# Altium PCB Copy of Irrigation_System.PcbDoc
Units mm, origin at the board's own origin, x right, y up, seen from the top; angles counter-clockwise.
Board outline 159.5 x 91.22 mm, 2 copper layers (Top Layer, Bottom Layer); 27 components, 26 nets, 100 pads, 0 vias.
Unrouted connection lines stored in the file: 1.
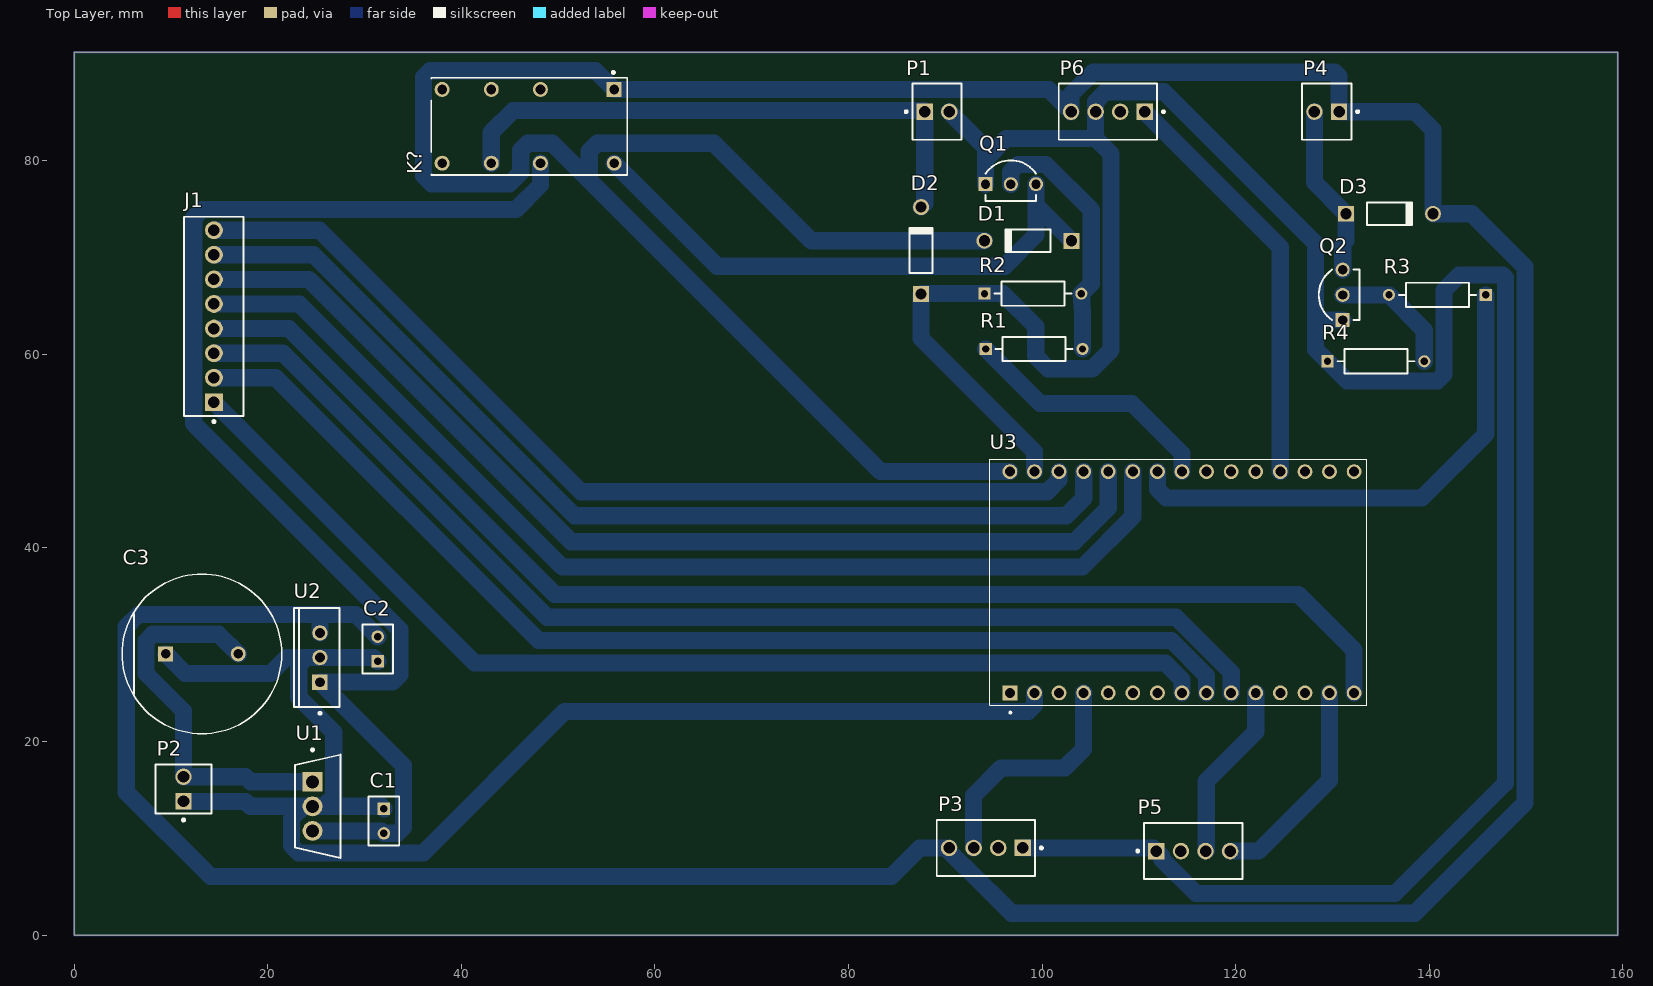
[diagram p0: Top Layer view]
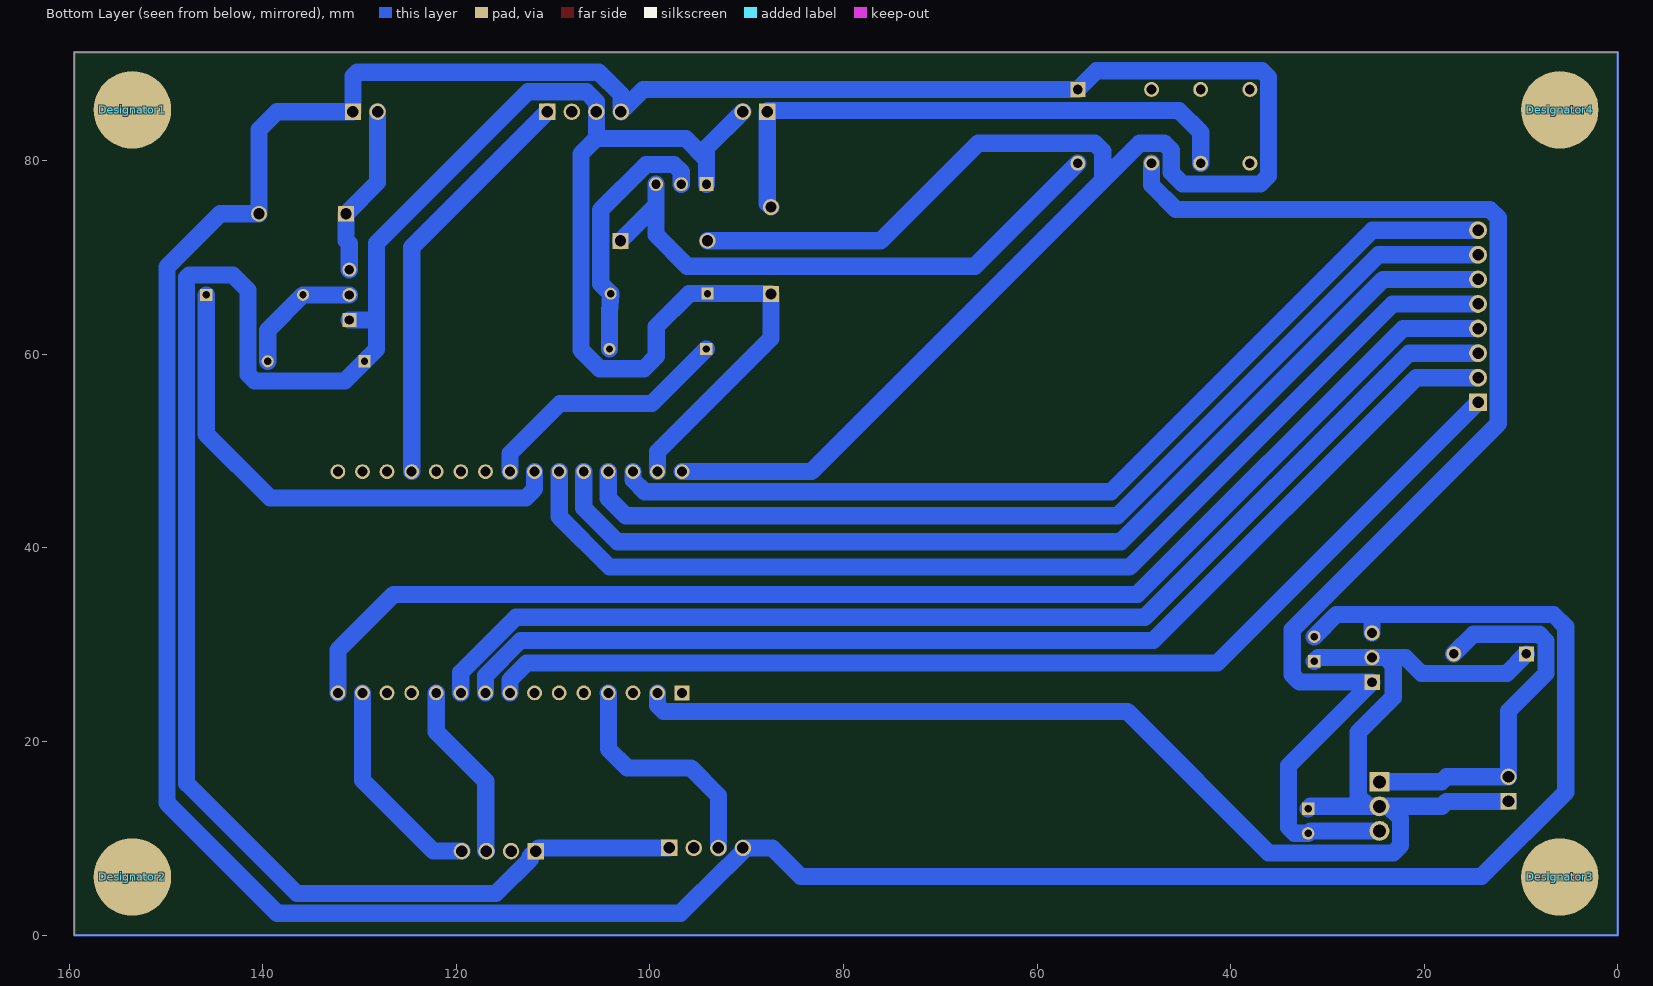
[diagram p1: Bottom Layer view, seen from below]

## Layer stack, top to bottom
Top Solder: solder mask 0.0102, Solder Resist, Dk 3.5
Top Layer: signal copper 0.0356
Dielectric 1: dielectric 0.32, FR-4, Dk 4.8
Bottom Layer: signal copper 0.0356
Bottom Solder: solder mask 0.0102, Solder Resist, Dk 3.5

## Board outline
0,0.325 0,0.475 0,91.225 159.15,91.225 159.325,91.225 159.5,91.225 159.5,0 0.2,0 0,0

## Design rules (kind name [scope] priority, off if disabled: settings)
Clearance [All] p1: gap=0.254 ignorepadtopadclearanceinfootprint=FALSE
PolygonConnect [All] p1: connectstyle=Relief reliefconductorwidth=0.254 reliefentries=4 polygonreliefangle="90 Angle" airgapwidth=0.254
RoutingLayers [All] p1: top layer_v5=FALSE bottom layer_v5=TRUE
RoutingVias [All] p1: holewidth=0.711 width=1.27 viastyle="Through Hole" minholewidth=0.711 minwidth=1.27 maxholewidth=0.711 maxwidth=1.27
SolderMaskExpansion [All] p1: expansion=0.102 istentingtop=FALSE
SupplyNets "Schematic Supply Nets_3" [InNet('+12V')] p1: voltage=0.000
SupplyNets "Schematic Supply Nets_2" [InNet('GND')] p2: voltage=0.000
SupplyNets "Schematic Supply Nets_1" [InNet('+5V')] p3: voltage=0.000
SupplyNets "Schematic Supply Nets" [InNet('+24V')] p4: voltage=0.000
Width [All] p1: maxlimit=1.778 minlimit=1.778 preferedwidth=1.778 minimp=50.000000 maximp=50.000000 favimp=50.000000
29 further rules are at their usual default settings.

## Components (designator, comment, footprint, x,y, rotation, side; value= is the part's Value field where it differs from the comment)
C1 "100nf" CAPR51-254-508X318X736 32.006,11.78 r270 top
C2 "100nf" CAPR51-254-508X318X736 31.371,29.56 r90 top
C3 "1000uf" FP-RAD-TH-D_16_0_5-L_25_2-MFG 13.21,29.052 r0 top
D1 "1N4001-T" DIOD-DO-41-P-2_V 98.554,71.729 r180 top
D2 "1N4001-T" DIOD-DO-41-P-2_V 87.505,70.713 r90 top
D3 "1N4001-T" DIOD-DO-41-P-2_V 135.892,74.523 r0 top
Designator1 "Comment" 7466214 153.475,85.25 r180 bottom
Designator2 "Comment" 7466214 153.475,6 r180 bottom
Designator3 "Comment" 7466214 6,6 r180 bottom
Designator4 "Comment" 7466214 6,85.25 r180 bottom
J1 "Keypad (4x4)" FP-22-29-2081-MFG 14.43,63.93 r270 top
K? "V23105A5305A201" FP-V23105A5305A201-MFG 47.025,83.55 r180 top
P1 "FAN (Connect)" MOLX-22-27-2021_V 89.156,85.064 r0 top
P2 "+24V IN" MOLX-22-27-2021_V 11.305,15.082 r90 top
P3 "22-27-2041" MOLX-22-27-2041_V 94.205,9 r0 top
P4 "Water Pump (Connect)" MOLX-22-27-2021_V 129.415,85.064 r180 top
P5 "LCD 16x2( I2C)" MOLX-22-27-2041_V 115.625,8.675 r180 top
P6 "Hygrometer Humidity" MOLX-22-27-2041_V 106.809,85.064 r0 top
Q1 "2N7000-D74Z" FP-135AR-MFG 96.776,77.952 r90 top
Q2 "2N7000-D74Z" FP-135AR-MFG 130.685,66.141 r180 top
R1 "220 ohms" FP-MRS25-MFG 99.189,60.553 r0 top
R2 "100.0k ohms" FP-MRS25-MFG 99.062,66.268 r0 top
R3 "220 ohms" FP-MRS25-MFG 140.845,66.141 r180 top
R4 "100.0 ohm" FP-MRS25-MFG 134.495,59.283 r0 top
U1 "LM7812CT" FP-TO220B03-MFG 25.18,13.299 r0 top
U2 "LM7805CT" FAIR-TO-220-3 25.402,28.671 r180 top
U3 "ESP32" XCVR_ESP32-C3-DEVKITC-02 114.075,36.45 r90 top

## Footprints (in the part's own frame and the unit in brackets; to place one, negate y for a bottom-side part, rotate by r counter-clockwise, add the part's x,y. Pads: shape width x height; smd on the part's side, far side on the other; paste and mask are expansions set on the pad)
7466214 [mm] "SMD with external thread with Pin, M4-5mm"
  round 8 smd paste-403.566: 1(0,0)
  body extent -3.49,-3.5 3.49,3.5, height 8
CAPR51-254-508X318X736 [mm] "THD, 2-Leads, Body 5.08x3.18mm"
  rect 1.3x1.3 hole 0.8: 1(-1.27,0)
  round 1.3 hole 0.8: 2(1.27,0)
  silkscreen extent -2.54,-1.59 2.54,1.59, body extent -2.54,-1.59 2.54,1.59, height 7.36
DIOD-DO-41-P-2_V [mm] "2-Leads, Axial Lead, Body 4.635x2.36mm, Pin Spacing 9mm"
  rect 1.65x1.65 hole 1.15: 1(-4.5,0)
  round 1.65 hole 1.15: 2(4.5,0)
  silkscreen extent -2.32,-1.18 2.32,1.18, body extent -4.93,-1.18 4.93,1.18, height 2.35
FAIR-TO-220-3 [mm] "FM, 3-Leads, Body 10.2x4.7mm, Pitch 2.54mm"
  rect 1.6x1.6 hole 1: 1(0,2.54)
  round 1.6 hole 1: 2(0,0) 3(0,-2.54)
  silkscreen extent -2.04,-5.1 2.66,5.87, body extent -2.04,-5.1 2.66,5.1, height 18.95
FP-22-29-2081-MFG [mm]
  rect 1.84x1.84 hole 1.19 paste-2539.97 mask+0: 1(8.89,0.02)
  round 1.84 hole 1.19 paste-2539.97 mask+0: 2(6.35,0.02) 3(3.81,0.02) 4(1.27,0.02) 5(-1.27,0.02) 6(-3.81,0.02) 7(-6.35,0.02) 8(-8.89,0.02)
  silkscreen extent -10.29,-3.08 11.01,3.07, body extent -10.39,-3.18 10.39,3.17, height 0.25
FP-135AR-MFG [mm]
  rect 1.45x1.45 hole 0.95 paste-2539.97 mask+0: 1(-0.38,2.6)
  round 1.45 hole 0.95 paste-2539.97 mask+0: 2(-0.38,0) 3(-0.38,-2.6)
  silkscreen extent -2.1,-2.6 2.09,2.6, body extent -2.19,-3.42 2.19,3.42, height 0.25
FP-MRS25-MFG [mm]
  rect 1.25x1.25 hole 0.75 paste-2539.97 mask+0: 1(-5,0)
  round 1.25 hole 0.75 paste-2539.97 mask+0: 2(5,0)
  silkscreen extent -3.97,-1.25 3.97,1.25, body extent -5.72,-1.35 5.72,1.35, height 0.25
FP-RAD-TH-D_16_0_5-L_25_2-MFG [mm]
  rect 1.55x1.55 hole 1 paste-2539.97 mask+0: 1(-3.75,0)
  round 1.55 hole 1 paste-2539.97 mask+0: 2(3.75,0)
  silkscreen extent -8.25,-8.25 8.25,8.25, body extent -8.35,-8.35 8.35,8.35, height 0.25
FP-TO220B03-MFG [mm]
  rect 2.05x2.05 hole 1.35 paste-2539.97 mask+0: 1(-0.54,2.535)
  round 2.05 hole 1.35 paste-2539.97 mask+0: 2(-0.54,0) 3(-0.54,-2.535)
  silkscreen extent -2.35,-5.33 2.35,5.96, body extent -2.45,-5.44 2.45,5.44, height 0.25
FP-V23105A5305A201-MFG [mm]
  rect 1.55x1.55 hole 1 paste-2539.97 mask+0: 1(-8.78,-3.81)
  round 1.55 hole 1 paste-2539.97 mask+0: 4(-1.16,-3.81) 6(3.92,-3.81) 8(9,-3.81) 9(9,3.81) 11(3.92,3.81) 13(-1.16,3.81) 16(-8.78,3.81)
  silkscreen extent -10.12,-5.7 10.13,5.02, body extent -10.23,-5.13 10.23,5.13, height 0.25
MOLX-22-27-2021_V [mm] "Header, 2-Leads, Body 5.8x5.08mm"
  rect 1.7x1.7 hole 1.19: 1(-1.27,0)
  round 1.7 hole 1.19: 2(1.27,0)
  silkscreen extent -3.31,-2.9 2.54,2.9, body extent -2.54,-2.9 2.54,2.9, height 11.72
MOLX-22-27-2041_V [mm] "CONN, 4-Leads, Body 10.16x5.8mm, Pitch 2.54mm"
  rect 1.7x1.7 hole 1.19: 1(3.81,0)
  round 1.7 hole 1.19: 2(1.27,0) 3(-1.27,0) 4(-3.81,0)
  silkscreen extent -5.08,-2.9 5.86,2.9, body extent -5.08,-2.9 5.08,2.9, height 11.7
XCVR_ESP32-C3-DEVKITC-02 [mm]
  rect 1.53x1.53 hole 1.02: 1(-11.43,17.392)
  round 1.53 hole 1.02: 2(-11.43,14.852) 3(-11.43,12.312) 4(-11.43,9.772) 5(-11.43,7.232) 6(-11.43,4.692) 7(-11.43,2.152) 8(-11.43,-0.388) 9(-11.43,-2.928) 10(-11.43,-5.468) 11(-11.43,-8.008) 12(-11.43,-10.548) 13(-11.43,-13.088) 14(-11.43,-15.628) 15(-11.43,-18.168) 16(11.43,-18.168) 17(11.43,-15.628) 18(11.43,-13.088) 19(11.43,-10.548) 20(11.43,-8.008) 21(11.43,-5.468) 22(11.43,-2.928) 23(11.43,-0.388) 24(11.43,2.152) 25(11.43,4.692) 26(11.43,7.232) 27(11.43,9.772) 28(11.43,12.312) 29(11.43,14.852) 30(11.43,17.392)
  silkscreen extent -13.56,-19.46 12.7,19.45

## Part data
C1 C2: library part CMP-1664-00004-1, "Radial Leaded Multilayer Ceramic Capacitor, 0.1 uF, +/- 10%, 50 V, -55 to 125 degC, 2-Pin THD, RoHS, Tape and Reel", Case\Package=SOT-23-5, Dropout Voltage="260 mV", Max Input Voltage="8 V", Max Operating Temperature="85 degC", Max Power Dissipation="250 mW", Min Operating Temperature="-40 degC", Output Current="150 mA", Output Voltage="5 V", Package Quantity=3000, ComponentLink1Description="Manufacturer URL", ComponentLink1URL=http://www.kemet.com/, ComponentLink2Description=Datasheet, ComponentLink2URL=http://www.kemet.com/docfinder?Partnumber=C320C104K5R5TA, DatasheetVersion=Dec-15, Height="1.3 mm", Length="3 mm", Mount="Surface Mount", Outputs=1, PackageDescription="2-Pin Through Hole Device, Body 5.08 x 3.18 mm, Pitch 2.54 mm", PackageReference=CAPR51-254-508X318X736, Packaging="Tape and Reel", Pins=5, Radiation Hardening=No, RoHSCompliant=true, Width="1.8 mm"
C3: library part CMP-05427-000487-1, "Aluminum Electrolytic Capacitors (Radial Lead Type) 1000uF ±20% 50V", Capacitance=1mF, Case/Package=Radial, ESR (Equivalent Series Resistance)=16mR, Max Operating Temperature=105°C, Min Operating Temperature=-40°C, Package Quantity=250, Ripple Current=3.32A, Tolerance=20%, Voltage Rating=50V, Contact Plating=Tin, Diameter=16mm, Features="General Purpose", Height=25mm, Height - Seated (Max)=0.984inch, Impedance=16mR, Lead Diameter=0.8mm, Lead Free="Lead Free", Lead Pitch=7.5mm, Length=25mm, Life (Hours)=10000Hour, Mount="Through Hole", Number of Pins=2, Packaging="Tape and Reel", Polarity=Polar, Radiation Hardening=No, REACH SVHC="No SVHC", RoHS Compliant=Yes, Series=FR, Termination="Through Hole", Voltage Rating (DC)=50V
D1 D2 D3: library part CMP-0639-00006-2, "1.0 A Rectifier, 15 pF, 50 V, -65 to 150 degC, 2-Pin DO-41 Plastic, RoHS, Tape and Reel", Manufacturer="Diodes Inc", Max. Average Rectified Current IO (A)=1, Operating Temperature Range (degC)="-65 to 150", ComponentLink1Description="Manufacturer URL", ComponentLink1URL=http://diodes.com/, ComponentLink2Description=Datasheet, ComponentLink2URL=http://diodes.com/datasheets/ds28002.pdf, CT (pF)=15, DatasheetVersion="Rev. 8-2", Max. IFSM (A)=30, Max. IR (uA)=5, Mounting Technology="Through Hole", PackageDescription="2-Pin Axial Lead, Body 4.635 x 2.36 mm, Lead Spread 25.4 mm", PackageReference=DO-41-P-2, Packing="Tape and Reel", PartNumber=1N4001-T, RoHS=TRUE, VF (V)=1, VRRM (V)=50
J1: library part CMP-00257-00277737-1, "22-29-2081 KK® 254 Wire-to-Board Header, Vertical, with Friction Lock, 8 Circuits, Gold (Au) Plating", Color=White, Contact Resistance=10mΩ, Current Rating=4A, Flammability Rating="UL94 V-0", Insulation Resistance=50GΩ, Max Operating Temperature=75°C, Min Operating Temperature=-40°C, Voltage Rating=250V, Contact Material=Brass, Contact Plating=Gold, Gender=Male, Glow Wire Compliant=Non-compliant, Halogen Free="Low Halogen", Height=11.42mm, Housing Material=Nylon, Lead Free="Lead Free", Lead Pitch=2.54mm, Mount="Through Hole", NexarPartId=277737, Number of Circuits=8, Number of Contacts=8, Number of Pins=8, Number of Positions=8, Number of Rows=1, Orientation=Vertical, Packaging=Bulk, Pitch=2.54mm, Radiation Hardening=No, REACH SVHC=Unknown, RoHS=Compliant, Schedule B=8536694040, Termination="Through Hole", Voltage Rating (DC)=250V
K?: library part CMP-03395-000159-1, "RELAY TELECOM DPDT 3A 24V", Ambient Temperature Range High=+85°C, Ambient Temperature Range Low=-40°C, Coil Power=200mW, Coil Resistance=2880Ω, Coil Voltage=24V, Current Rating=3A, Manufacturer="TE Connectivity", Temperature="-40°C to +85°C", Automotive=No, Category=Relay, Coil Type=Non-Latching, ComponentLink2Description=Datasheet, ComponentLink2URL=https://www.te.com/commerce/DocumentDelivery/DDEController?Action=showdoc&DocId=Specification+Or+Standard%7F108-98007%7F1017%7Fpdf%7FEnglish%7FENG_SS_108-98007_1017.pdf%7F9-1393792-9, Device Class L1=Electromechanical, Device Class L2=Relays, Device Class L3="Power Relays", Digikey Description="RELAY TELECOM DPDT 3A 24V", Height=10.9mm, Lead Free=Yes, Manufacturer Part Number=V23105A5305A201, Number of Contacts=2, Octopart=https://octopart.com/9-1393792-9-te+connectivity-41176539, Package=V23105A5305A201, RoHS=TRUE, Standoff Height=0.2mm, Switching Current=3A, Temperature Range High=+85°C, Temperature Range Low=-40°C, Throw Configuration=DPDT
P1 P2 P4: library part CMP-2000-05537-1, "Male Header, Pitch 2.54 mm, 1 x 2 Position, Height 11.7 mm, Tail Length 3.56 mm, 0 to 75 degC, RoHS, Bulk", Current - Max=4A, Manufacturer=Molex, Operating temperature=0°Cto+75°C, Package Description="2-Leads Header, Body 5.08 x 5.8 mm, Pitch 2.54 mm", Package Reference=22-27-2021, Package Version="Rev. BC, 02/2012", PartNumber=0022272021, Voltage - Max=250V, Contact Material=Tinplatedbrass, Current Rating=4A, Datasheet URL=http://www.molex.com/pdm_docs/sd/022272021_sd.pdf, Datasheet Version="Rev. F, 06/2009", Housing Material=Nylon(UL94V-0), Manufacturer URL=http://www.molex.com/, Mounting Technology=ThroughHole, No. of Positions=2, No. of Rows=1, Orientation=Vertical, Pitch=2.54mm, Voltage Rating=250V
P3 P5 P6: library part CMP-2000-05243-1, "Male Header, Pitch 2.54 mm, 1 x 4 Position, Height 11.7 mm, Tail Length 3.56 mm, RoHS, Bulk", Current Rating=4A, Manufacturer=Molex, Operating temperature=0degCto+75degC, Voltage Rating=250V, Contact Material=Tinplatedbrass, Datasheet URL=http://www.molex.com/pdm_docs/sd/022272041_sd.pdf, Datasheet Version="Rev. F, 06/2009", Housing Material=Nylon(UL94V-0), Manufacturer URL=http://www.molex.com/
Q1 Q2: library part CMP-00278-84793556-1, "2N7000-D74Z 2N7000 Series 60V 5 Ohms N-Ch Enhancement Mode Field Effect Transistor - TO-92", Continuous Drain Current (ID)=200mA, Drain to Source Breakdown Voltage=60V, Drain to Source Resistance=1.2Ω, Gate to Source Voltage (Vgs)=20V, Manufacturer Lifecycle Status=ACTIVE, Max Junction Temperature (Tj)=150°C, Min Operating Temperature=-55°C, Power Dissipation=400mW, Drain to Source Voltage (Vdss)=60V, Height=8.77mm, Lifecycle Status=Production, Max Operating Temperature=150°C, NexarPartId=84793556, Number of Channels=1, RoHS=Compliant, Schedule B=8541210080
R1 R2 R3 R4: library part CMP-00030-42632392-1, "MRS25000C1002FCT00 Resistor, 10 kOhm, ± 1%, 600 mW, Axial Leaded, Metal Film (Thin Film), Professional", Case/Package=Conformal, Max Operating Temperature=155°C, Max Power Dissipation=600mW, Min Operating Temperature=-55°C, Resistance=10kΩ, Temperature Coefficient=50ppm/°C, Tolerance=1%, Voltage Rating=350V, Composition="Metal Film, Thin Film", Contact Plating=Tin, Diameter=2.5mm, Lead Free="Lead Free", Lead Length=26mm, Length=6.5mm, Military Standard=Not, Mount="Through Hole", NexarPartId=42632392, Number of Pins=2, Number of Terminations=2, Power Rating=600mW, Radiation Hardening=No, REACH SVHC=Unknown, RoHS=Compliant, Schedule B="8533210090, 8533210090", Termination=Axial, Voltage Rating (DC)=350V, Width=2.5mm
U1: library part CMP-07128-000015-1, "IC REG LINEAR 12V 1A TO220-3", Dropout Voltage=2V, Manufacturer="ON Semiconductor", Max Supply Voltage=35V, Nominal Supply Current=5.1mA, Output Current=1A, Output Voltage=12V, Package=TO220B03, Temperature="-40°C to +125°C", Temperature Range High=+125°C, Temperature Range Low=-40°C, Accuracy Percentage=4%, Automotive=No, Category=IC, ComponentLink2Description=Datasheet, ComponentLink2URL=https://www.mouser.in/datasheet/2/308/LM7812-1125088.pdf, Device Class L1="Integrated Circuits (ICs)", Device Class L2="Power Management ICs", Device Class L3="Voltage Regulators - Linear", Digikey Description="IC REG LINEAR 12V 1A TO220-3", Height=20.4mm, Ipc Land Pattern Name=TO-220, Lead Free=Yes, Manufacturer Part Number=LM7812CT, Number Of Outputs=1, Obsolete Part=true, Octopart=https://octopart.com/lm7812ct-on+semiconductor-14383031, Output Type=Fixed, RoHS=TRUE, Standoff Height=2.7mm
U2: library part CMP-2000-04938-1, "Positive Voltage Regulator, 5 V, 1 A, -40 to 125 degC, 3-Pin TO-220, RoHS, Tube", Manufacturer=FairchildSemiconductor, Maximum Input Voltage=35V, Maximum Output Current=2.2(Typ)A, Maximum Quiescent Current=8mA, Operating temperature=-40to125degC, Output Voltage=5V, Package=3TO-220AB, Package Description="3-Pin Through Hole Device, Body 10 x 4.5 mm, Pitch 2.54 mm", Package Reference=TO-220, Typical Dropout Voltage @ Current=2@1AV, Accuracy=±4%, Category=LinearRegulator, Datasheet URL=https://datasheet.ciiva.com/26904/lm7805ct-26904988.pdf, Datasheet Version=Aug-12, Line Regulation=100mV, Load Regulation=100mV, Manufacturer URL=https://www.fairchildsemi.com/, Mounting=ThroughHole, Number Of Outputs=1, Output Type=Fixed, Package URL=https://www.fairchildsemi.com/package-drawings/TO/TO220B03.pdf, Packaging=Rail/Tube, Polarity=Positive, Rad Hard=No, Type=Linear
U3: library part ESP32-C3-DEVKITC-02, "Development Boards & Kits - Wireless (Engineering Samples) ESP32-C3 General-Purpose Development Board, embeds ESP32-C3-WROOM-02, 4 MB Flash, with Pin Header", Package=None, Availability="In Stock", Check_prices=https://www.snapeda.com/parts/ESP32-C3-DevKitC-02/Espressif+Systems/view-part/?ref=eda, MF="Espressif Systems", MP=ESP32-C3-DevKitC-02, Price=None, Purchase-URL=https://pricing.snapeda.com/search/part/ESP32-C3-DevKitC-02/?ref=eda, SnapEDA_Link=https://www.snapeda.com/parts/ESP32-C3-DevKitC-02/Espressif+Systems/view-part/?ref=snap

## Nets (pads, with @x,y where several pads share a name; then routed paths per layer and width w, separated by ;. In a path a pad name is that pad's centre, name@x,y a point inside that pad or via, vN(x,y) a via of type N, cw(c..) or ccw(c..) an arc to the next point about the centre after c; other vN are vias at no path point)
+5V: C2.2 D1.2 D3.2 K?.1 P3.4 P4.1 P6.4 U2.3 U3.30 | length 529.6
  Bottom Layer w1.778: U2.3 25.402,33.116 ; C2.2 29.085,33.116 25.402,33.116 ; D1.2 76.172,71.729 66.093,81.808 54.053,81.808 53.215,80.97 53.215,77.998 ; U3.30 83.333,47.88 53.215,77.998 ; 25.402,33.116 6.653,33.116 5.396,31.859 5.396,14.754 14.085,6.065 84.445,6.065 87.379,9 P3.4 90.395,8.666 92.093,6.968 92.148,6.968 96.861,2.255 138.5,2.255 149.913,13.668 149.913,69.006 144.396,74.523 D3.2 140.392,83.208 138.536,85.064 P4.1 130.685,88.717 130.253,89.148 105.285,89.148 102.999,86.862 P6.4 100.703,87.36 K?.1 53.864,89.301 36.781,89.301 36.095,88.615 36.095,78.455 36.959,77.591 44.96,77.591 46.153,78.784 46.153,81.092 46.865,81.804 49.408,81.804 53.215,77.998
+12V: C1.2 K?.13 U1.3 U2.1 | length 132.4
  Bottom Layer w1.778: U1.3 31.752,10.764 C1.2 33.403,10.51 34.038,11.145 34.038,17.495 U2.1 32.895,26.131 33.657,26.893 33.657,31.557 12.372,52.842 12.372,74.112 13.21,74.95 45.645,74.95 48.185,77.49 K?.13
+24V: C3.2 P2.2 U1.1 | length 39.8
  Bottom Layer w1.778: C3.2 14.928,31.084 8.13,31.084 7.428,30.382 7.428,27.02 11.305,23.143 P2.2 17.714,16.352 18.232,15.834 U1.1
"A0 (Analogue)": P6.1 U3.19 | length 43
  Bottom Layer w1.778: P6.1 124.623,71.06 U3.19
"Column (01)": J1.5 U3.25 | length 113
  Bottom Layer w1.778: J1.5 23.275,65.2 50.45,38.025 104.175,38.025 109.383,43.233 U3.25
"Column (02)": J1.6 U3.26 | length 108.8
  Bottom Layer w1.778: J1.6 24.235,67.74 51.35,40.625 103.35,40.625 106.843,44.118 U3.26
"Column (03)": J1.7 U3.27 | length 104.5
  Bottom Layer w1.778: J1.7 24.745,70.28 51.7,43.325 102.5,43.325 104.303,45.128 U3.27
"Column (04)": J1.8 U3.28 | length 99.9
  Bottom Layer w1.778: J1.8 25.355,72.82 52.375,45.8 100.55,45.8 101.763,47.013 U3.28
"D0 (Digital)": P6.2
"DHT22 Data": P3.3 U3.4 | length 24.6
  Bottom Layer w1.778: P3.3 92.935,14.41 95.8,17.275 102.35,17.275 104.3,19.225 104.3,25.017 U3.4
"Fan Switch (Control)": R1.1 U3.23 | length 26.6
  Bottom Layer w1.778: R1.1 99.827,54.915 109.293,54.915 114.463,49.745 U3.23
GND: C1.1 C2.1 C3.1 D2.1 P1.2 P2.1 P3.1 P5.1 P6.3 Q1.1 Q2.1 R2.1 R4.1 U1.2 U2.2 U3.2 U3.29 | length 432
  Bottom Layer w1.778: C3.1 11.492,27.02 20.297,27.02 21.948,28.671 24.005,28.671 ; P2.1 17.679,13.812 18.192,13.299 U1.2@23.721,13.299 ; C2.1 30.99,28.671 U2.2 24.005,28.671 ; C1.1 31.757,13.299 U1.2 ; P1.2 94.176,81.314 94.176,80.153 ; Q1.1 94.176,80.153 ; P3.1 111.49,9 P5.1 112.362,8.128 112.362,7.849 115.924,4.287 136.475,4.287 147.838,15.65 147.881,15.65 147.881,67.914 147.601,68.193 143.106,68.193 141.531,66.619 141.531,57.932 140.845,57.246 131.532,57.246 R4.1 128.247,60.531 128.247,63.5 ; U3.2 99.223,23.726 98.605,23.108 50.7,23.108 36.07,8.478 23.218,8.478 22.456,9.24 22.456,12.034 U1.2@23.721,13.299 ; U3.29 99.223,49.931 87.505,61.649 D2.1 87.56,66.268 R2.1 95.957,66.268 99.35,62.875 99.35,59.792 100.626,58.516 105.183,58.516 107.139,60.472 107.139,80.69 105.539,82.29 ; Q2.1 128.288,63.541 128.247,63.5 ; U1.2@23.721,13.299 U1.2 ; 24.005,28.671 23.218,27.884 23.218,24.556 26.824,20.949 26.824,14.32 25.904,13.399 U1.2 ; 94.176,80.153 96.314,82.29 105.539,82.29 ; 105.539,82.29 P6.3 105.539,86.1 106.555,87.116 112.6,87.116 128.247,71.47 128.247,63.5
NetD1_1: D1.1 K?.16 Q1.3 | length 59.7
  Bottom Layer w1.778: K?.16 66.437,69.108 96.141,69.108 99.376,72.343 99.376,75.407 ; Q1.3 99.376,75.407 ; D1.1 99.376,75.407
NetD2_2: D2.2 K?.11 P1.1 | length 59
  Bottom Layer w1.778: K?.11 43.105,82.93 45.35,85.175 87.775,85.175 P1.1 87.886,75.594 D2.2
NetD3_1: D3.1 P4.2 Q2.3 | length 17.8
  Bottom Layer w1.778: P4.2 128.145,77.77 D3.1 131.392,71.772 131.065,71.445 Q2.3
NetQ1_2: Q1.2 R1.2 R2.2 | length 26.6
  Bottom Layer w1.778: Q1.2 96.776,78.867 97.513,79.604 100.402,79.604 105.086,74.92 105.086,67.292 R2.2 104.189,64.355 R1.2
NetQ2_2: Q2.2 R3.2 R4.2 | length 13.1
  Bottom Layer w1.778: Q2.2 R3.2 139.495,62.491 R4.2
NULL: P3.2
"Row (01)": J1.1 U3.8 | length 113.2
  Bottom Layer w1.778: J1.1 41.39,28.1 112.725,28.1 114.463,26.362 U3.8
"Row (02)": J1.2 U3.9 | length 117.1
  Bottom Layer w1.778: J1.2 20.845,57.58 48,30.425 113.376,30.425 117.003,26.799 U3.9
"Row (03)": J1.3 U3.10 | length 120.9
  Bottom Layer w1.778: J1.3 21.58,60.12 48.875,32.825 113.85,32.825 119.543,27.132 U3.10
"Row (04)": J1.4 U3.15 | length 136
  Bottom Layer w1.778: J1.4 22.19,62.66 49.65,35.2 126.475,35.2 132.243,29.432 U3.15
SCL: P5.4 U3.14 | length 22.3
  Bottom Layer w1.778: P5.4 122.373,8.675 129.703,16.005 U3.14
SDA: P5.3 U3.11 | length 18.5
  Bottom Layer w1.778: P5.3 116.969,8.749 116.969,15.895 122.083,21.009 U3.11
VCC: P5.2
"Water Pump (Control)": R3.1 U3.24 | length 53.2
  Bottom Layer w1.778: U3.24 111.923,46.07 112.837,45.156 139.243,45.156 145.845,51.757 R3.1
pads on no net: Designator1.1 Designator2.1 Designator3.1 Designator4.1 K?.4 K?.6 K?.8 K?.9 U3.1 U3.3 U3.5 U3.6 U3.7 U3.12 U3.13 U3.16 U3.17 U3.18 U3.20 U3.21 U3.22
copper on no net: | length 501.5
  Bottom Layer w0.254: 0,0 159.5,0 159.5,91.225 0,91.225 0,0